# EAGLE board mcu_sub (EAGLE 7.7.0)
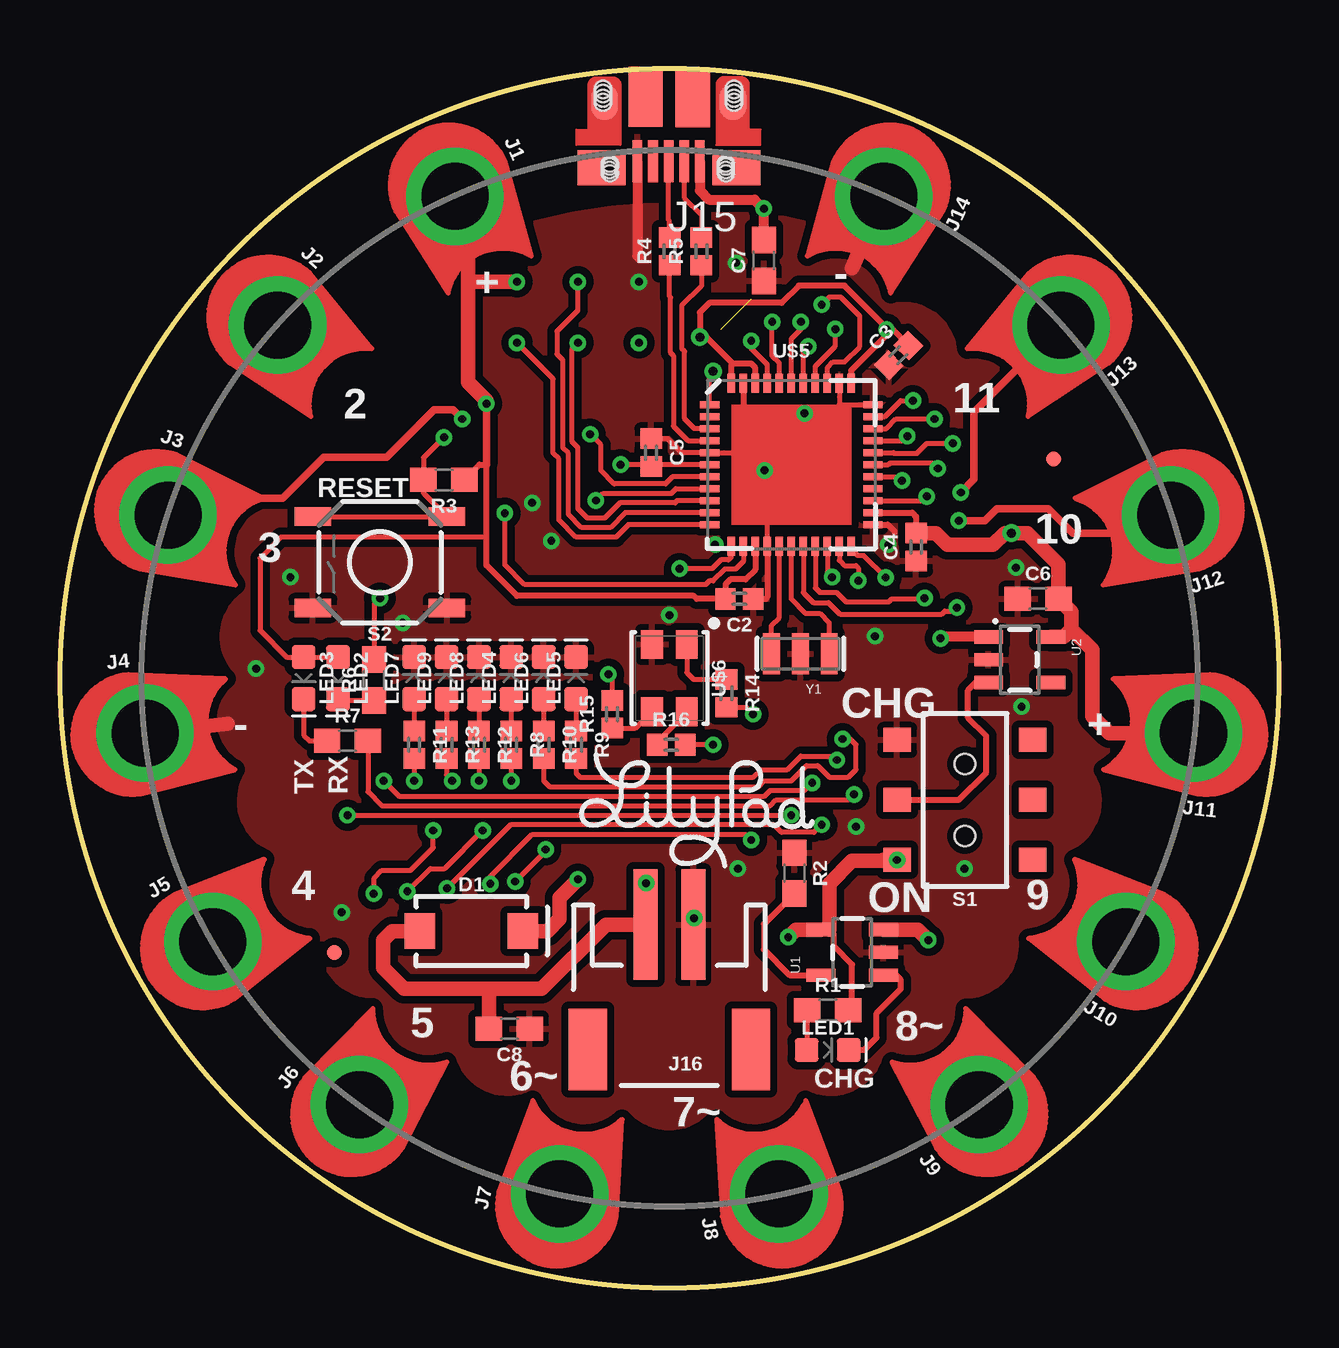
[diagram p0: board, top side]
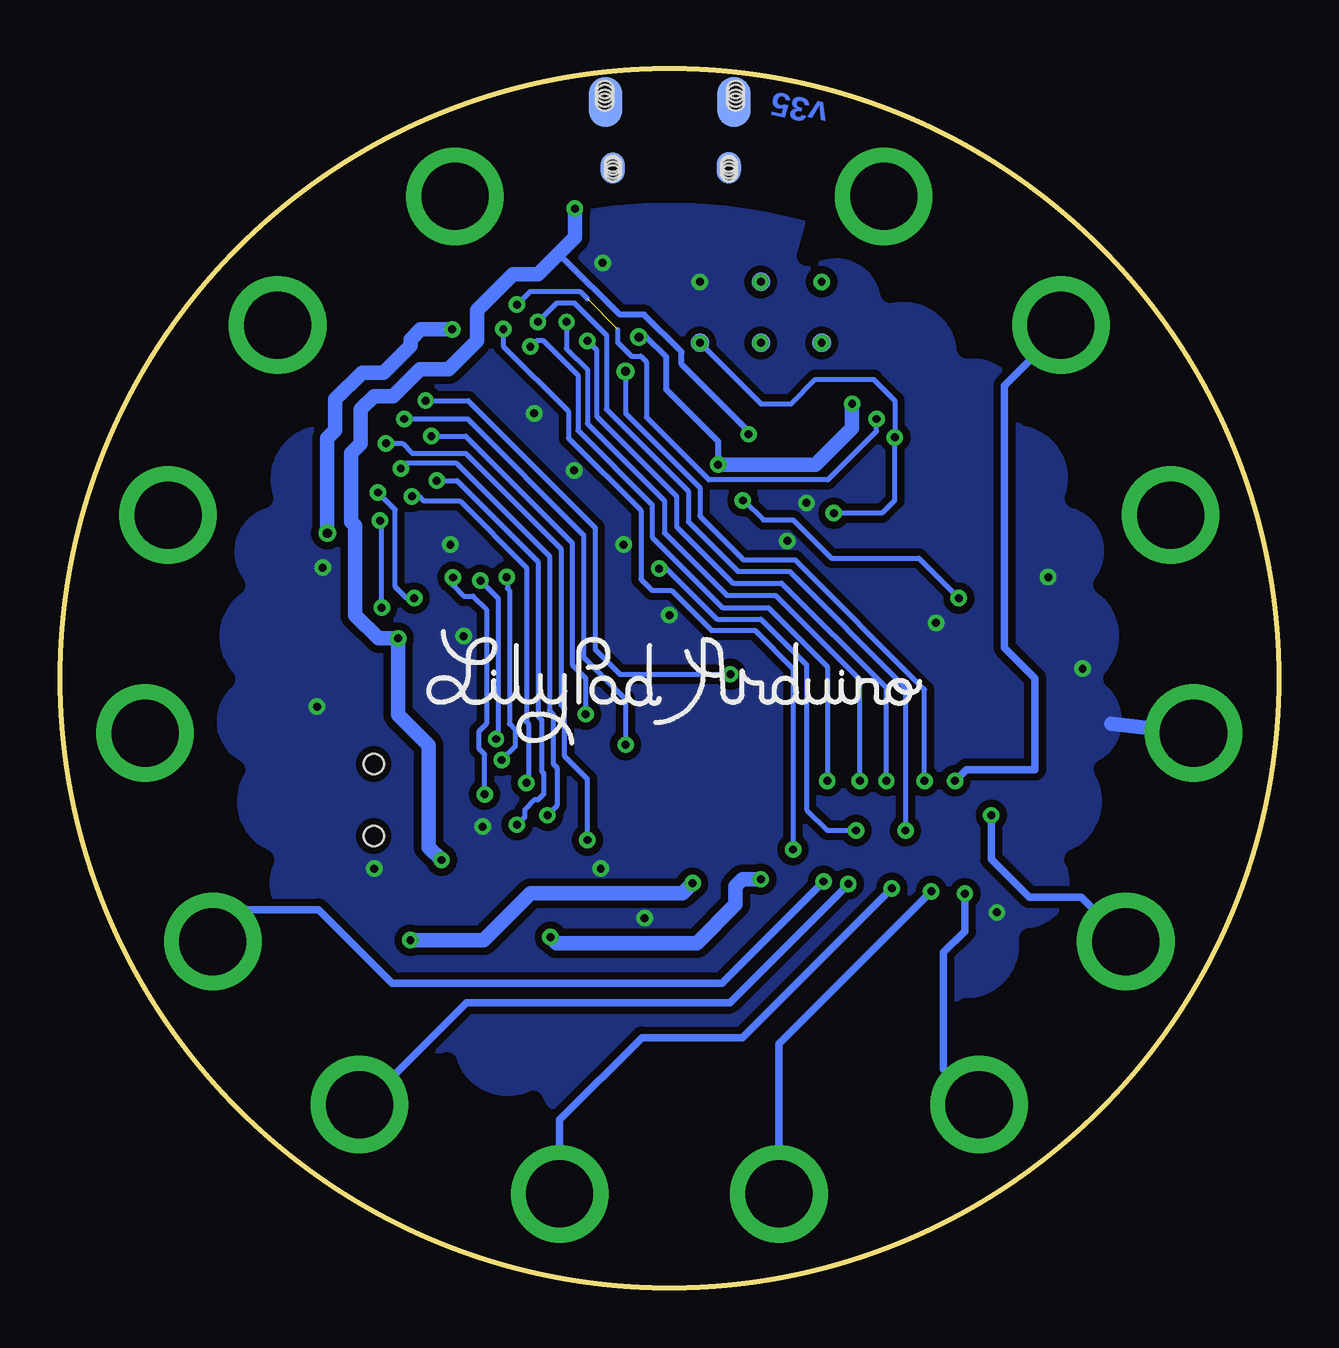
[diagram p1: board, bottom side, seen from below]

Size 50.8 x 50.8 mm. Coordinates in mm from the lower left corner, seen from the top.
Outline: circle at 25.4,25.4 radius 25.4
Copper layers (1*16): Top 0.035mm / dielectric 1.5mm / Bottom 0.035mm
Design rules "SparkFun-2-layer-TIGHT": minimum track width 7mil, minimum drill 15mil, track to track 7mil, track to pad 7mil, pad to pad 7mil, via to via 7mil, smd to smd 7mil, copper to edge 7mil, drill to drill 7mil, minimum pad ring 7mil, minimum via ring 7mil, stop-mask expansion 4mil, vias tented up to drill 25mil, thermal gap 10mil
tRestrict: 1 lines
bRestrict: 1 lines

## Footprints (pad centres in the part's own frame; a part is rotated, then mirrored left to right if it is on the bottom)
0402 = smd 0.85 x 0.9: 1 -0.58,0; 2 0.58,0
0603 = smd 1.1 x 1: 1 -0.85,0; 2 0.85,0
SMA-DIODE = smd 1.27 x 1.47: A -2.15,0; C 2.15,0
PETAL-LONG-1 = drill 2.794 pad 4.064: 1 0.03,0
USB-MICROB-PTH = smd 0.4 x 1.75: D+ 0.031,1.331; D- -0.619,1.331; GND 1.331,1.331; ID 0.681,1.331; VBUS -1.269,1.331 | smd 1.4 x 2.1 bottom: P$1 2.701,-1.142; P$3 -2.659,-1.144 | smd 1 x 1.3: P$2 2.487,1.594; P$6 -2.368,1.604 | smd 1 x 1.3 bottom: P$4 -2.368,1.604; P$10 2.481,1.598 | smd 1.1 x 1.5: P$8 2.701,-1.142; P$12 -2.659,-1.144 | smd 2 x 1.46: SHEILD2 2.831,1.606; SHIELD -2.794,1.606 | smd 1.425 x 2.5: SHIELD3 -0.979,-1.349; SHIELD4 0.996,-1.352 | hole 0.7: -2.693,-1.134; -2.693,-1.3; -2.694,-1.499; -2.694,-1.664; 2.768,-1.134; 2.767,-1.303; 2.766,-1.496; 2.766,-1.664 | hole 0.66: -2.359,1.821; -2.349,1.691; -2.359,1.541; -2.354,1.432; 2.481,1.821; 2.491,1.691; 2.481,1.541; 2.486,1.432
JST-2-SMD = smd 1 x 4.6: 1 -1,-3.7; 2 1,-3.7 | smd 1.6 x 3.4: NC1 -3.4,1.5; NC2 3.4,1.5
MICRO-FIDUCIAL = smd 0.635 x 0.635: 1 0,0
LED-0603 = smd 1 x 1: A -0.877,0; C 0.877,0
SWITCH_DPDT_SMD_AYZ0202 = smd 1 x 1.15: 1 -2.5,2.825; 2 0,2.825; 3 2.5,2.825; 4 -2.5,-2.825; 5 0,-2.825; 6 2.5,-2.825 | hole 0.85: 1.5,0; -1.5,0
TACTILE_SWITCH_SMD_5.2MM = smd 1.524 x 0.762: 1 -2.794,1.905; 2 2.794,1.905; 3 -2.794,-1.905; 4 2.794,-1.905
PAD.03X.03 = smd 0.762 x 0.762: P$1 0,0
SOT23-5 = smd 0.55 x 1.2: 1 -0.95,-1.3; 2 0,-1.3; 3 0.95,-1.3; 4 0.95,1.3; 5 -0.95,1.3
QFN-44 = smd 0.8 x 0.3: 1 -3.4,2.5; 2 -3.4,2; 3 -3.4,1.5; 4 -3.4,1; 5 -3.4,0.5; 6 -3.4,0; 7 -3.4,-0.5; 8 -3.4,-1; 9 -3.4,-1.5; 10 -3.4,-2; 11 -3.4,-2.5; 23 3.4,-2.5; 24 3.4,-2; 25 3.4,-1.5; 26 3.4,-1; 27 3.4,-0.5; 28 3.4,0; 29 3.4,0.5; 30 3.4,1; 31 3.4,1.5; 32 3.4,2; 33 3.4,2.5 | smd 0.3 x 0.8: 12 -2.5,-3.4; 13 -2,-3.4; 14 -1.5,-3.4; 15 -1,-3.4; 16 -0.5,-3.4; 17 0,-3.4; 18 0.5,-3.4; 19 1,-3.4; 20 1.5,-3.4; 21 2,-3.4; 22 2.5,-3.4; 34 2.5,3.4; 35 2,3.4; 36 1.5,3.4; 37 1,3.4; 38 0.5,3.4; 39 0,3.4; 40 -0.5,3.4; 41 -1,3.4; 42 -1.5,3.4; 43 -2,3.4; 44 -2.5,3.4
PLCC4SMDLED = smd 1.2 x 0.9: 1 -1.4,0.725; 2 1.4,0.725; 3 1.4,-0.725; 4 -1.4,-0.725
RESONATOR-SMD = smd 0.7 x 1.7: 1 -1.2,0; 2 0,0; 3 1.2,0

## Placement (x,y rotation side)
C2  0.1uF  [0402]  28.32,28.7 180 top
C3  0.1uF  [0402]  34.96,38.85 45 top
C4  0.1uF  [0402]  35.69,30.86 90 top
C5  1.0uF  [0402]  24.64,34.8 270 top
C6  4.7uF  [0603]  40.77,28.7 0 top
C7  4.7uF  [0603]  29.34,42.8 90 top
C8  4.7uF  [0603]  18.73,10.8 180 top
D1  3A/40V/500mV  [SMA-DIODE]  17.15,14.86 0 top
FRAME1  FRAME-LETTER  [CREATIVE_COMMONS]  -8.51,-10.16 0 top  (outside the outline)
J1  SEWTAP_LONG  [PETAL-LONG-1]  16.45,45.5 294 top
J2  SEWTAP_LONG  [PETAL-LONG-1]  9.05,40.12 318 top
J3  SEWTAP_LONG  [PETAL-LONG-1]  4.48,32.2 342 top
J4  SEWTAP_LONG  [PETAL-LONG-1]  3.52,23.1 6 top
J5  SEWTAP_LONG  [PETAL-LONG-1]  6.35,14.4 30 top
J6  SEWTAP_LONG  [PETAL-LONG-1]  12.47,7.6 54 top
J7  SEWTAP_LONG  [PETAL-LONG-1]  20.83,3.88 78 top
J8  SEWTAP_LONG  [PETAL-LONG-1]  29.97,3.88 102 top
J9  SEWTAP_LONG  [PETAL-LONG-1]  38.33,7.6 126 top
J10  SEWTAP_LONG  [PETAL-LONG-1]  44.45,14.4 150 top
J11  SEWTAP_LONG  [PETAL-LONG-1]  47.28,23.1 174 top
J12  SEWTAP_LONG  [PETAL-LONG-1]  46.32,32.2 198 top
J13  SEWTAP_LONG  [PETAL-LONG-1]  41.75,40.12 222 top
J14  SEWTAP_LONG  [PETAL-LONG-1]  34.35,45.5 246 top
J15  AMP FCI 10103594-0001LF  [USB-MICROB-PTH]  25.4,48.26 180 top
J16  [JST-2-SMD]  25.4,11.43 180 top
JP2  FIDUCIALUFIDUCIAL  [MICRO-FIDUCIAL]  11.43,13.97 0 top
JP3  FIDUCIALUFIDUCIAL  [MICRO-FIDUCIAL]  41.42,34.53 0 top
LED1  RED  [LED-0603]  32,9.91 0 top
LED2  RED  [LED-0603]  11.59,25.4 270 top
LED3  RED  [LED-0603]  10.16,25.4 270 top
LED4  WHITE  [LED-0603]  18.81,25.4 90 top
LED5  WHITE  [LED-0603]  21.51,25.4 90 top
LED6  WHITE  [LED-0603]  20.16,25.4 90 top
LED7  WHITE  [LED-0603]  14.76,25.4 90 top
LED8  WHITE  [LED-0603]  17.46,25.4 90 top
LED9  WHITE  [LED-0603]  16.11,25.4 90 top
R1  330  [0603]  32,11.56 0 top
R2  10k  [0603]  30.61,17.27 270 top
R3  10k  [0603]  16,33.66 180 top
R4  22  [0402]  25.42,43.18 90 top
R5  22  [0402]  26.73,43.18 90 top
R6  330  [0603]  13.1,25.32 90 top
R7  330  [0603]  11.99,22.78 0 top
R8  22  [0402]  18.81,22.62 270 top
R9  22  [0402]  21.51,22.62 270 top
R10  22  [0402]  20.16,22.62 270 top
R11  22  [0402]  14.76,22.62 270 top
R12  22  [0402]  17.46,22.62 270 top
R13  22  [0402]  16.11,22.62 270 top
R14  22  [0402]  27.78,24.76 270 top
R15  22  [0402]  23.02,23.89 90 top
R16  22  [0402]  25.48,22.62 0 top
S1  [SWITCH_DPDT_SMD_AYZ0202]  37.72,20.32 90 top
S2  !RESET  [TACTILE_SWITCH_SMD_5.2MM]  13.33,30.23 180 top
TP1  TEST-POINT3  [PAD.03X.03]  19.05,39.37 0 bottom
TP2  TEST-POINT3  [PAD.03X.03]  21.59,41.91 0 bottom
TP3  TEST-POINT3  [PAD.03X.03]  21.59,39.37 0 bottom
TP4  TEST-POINT3  [PAD.03X.03]  24.13,39.37 0 bottom
U1  MCP73831  [SOT23-5]  33.02,13.97 90 top
U2  3.3V  [SOT23-5]  40,26.16 270 top
U$1  LILYLOGO_LONG  [LILYPAD-WEARABLES_LOGO-LPA]  25.4,25.4 0 bottom
U$3  [PETAL_PAD_OFF]  16.45,45.5 294 top
U$5  32U4  [QFN-44]  30.48,34.29 0 top
U$6  XZM2CRKM2DGFBB45SCCB  [PLCC4SMDLED]  25.4,25.4 270 top
U$7  [PETAL_SPACE_OFF]  16.45,45.5 294 top
U$8  [PETAL_SPACE_OFF]  44.45,14.4 150 top
U$9  [PETAL_PAD_OFF]  44.45,14.4 150 top
U$10  [PETAL_SPACE_OFF]  46.32,32.2 198 top
U$11  [PETAL_PAD_OFF]  46.32,32.2 198 top
U$12  [PETAL_SPACE_OFF]  47.28,23.1 174 top
U$13  LILYLOGO_SHORT  [LILYPAD-WEARABLES_LOGO-LILYPAD]  26.59,20.24 0 top
U$15  [PETAL_PAD_OFF]  47.28,23.1 174 top
U$16  [PETAL_SPACE_OFF]  41.75,40.12 222 top
U$17  [PETAL_PAD_OFF]  41.75,40.12 222 top
U$18  [PETAL_SPACE_OFF]  20.83,3.88 78 top
U$19  [PETAL_PAD_OFF]  12.47,7.6 54 top
U$20  [PETAL_SPACE_OFF]  12.47,7.6 54 top
U$21  [PETAL_PAD_OFF]  20.83,3.88 78 top
U$22  [PETAL_SPACE_OFF]  29.97,3.88 102 top
U$23  [PETAL_PAD_OFF]  29.97,3.88 102 top
U$24  [PETAL_SPACE_OFF]  38.33,7.6 126 top
U$25  [PETAL_PAD_OFF]  38.33,7.6 126 top
U$26  [PETAL_SPACE_OFF]  9.05,40.12 318 top
U$27  [PETAL_PAD_OFF]  9.05,40.12 318 top
U$28  [PETAL_SPACE_OFF]  4.48,32.2 342 top
U$29  [PETAL_PAD_OFF]  4.48,32.2 342 top
U$30  [PETAL_SPACE_OFF]  3.52,23.1 6 top
U$31  [PETAL_PAD_OFF]  3.52,23.1 6 top
U$32  [PETAL_SPACE_OFF]  6.35,14.4 30 top
U$33  [PETAL_PAD_OFF]  6.35,14.4 30 top
U$34  [PETAL_PAD_OFF]  34.35,45.5 246 top
Y1  8MHz  [RESONATOR-SMD]  30.86,26.42 180 top

## Library data of the parts
C2-C4 = SparkFun-Capacitors; PROD_ID: CAP-12416
C5 = SparkFun-Capacitors; PROD_ID: CAP-12417
C6-C8 = SparkFun-Capacitors; PROD_ID: CAP-08280
D1 = SparkFun-DiscreteSemi; PROD_ID: DIO-09886
FRAME1 = SparkFun-Aesthetics
J1-J14 = LilyPad-Wearables
J15 = SparkFun-Connectors; PROD_ID: CONN-13711
J16 = SparkFun-Connectors; PROD_ID: CONN-11443; SF_ID: PRT-08612
JP2 JP3 = SparkFun
LED1-LED3 = SparkFun-LED; PROD_ID: DIO-00819
LED4-LED9 = SparkFun-LED; PROD_ID: DIO-09004
R1 R6 R7 = SparkFun-Resistors; PROD_ID: RES-00818
R2 R3 = SparkFun-Resistors; PROD_ID: RES-00824
R4 R5 R8-R16 = SparkFun-Resistors; PROD_ID: RES-12427
S1 = SparkFun-Switches; PROD_ID: SWCH-08179; SF_SKU: COM-00597
S2 = SparkFun-Switches; PROD_ID: SWCH-08247; SF_SKU: COM-08720
TP1-TP4 = SparkFun-Connectors
U1 = SparkFun-PowerIC; PROD_ID: IC-09995
U2 = SparkFun-IC-Power; PROD_ID: VREG-12457
U$1 U$3 U$7-U$13 U$15-U$34 = newLilypadParts
U$5 = newLilypadParts; PROD_ID: IC-10828
U$6 = newLilypadParts; PROD_ID: NEW-XXXXX
Y1 = SparkFun-FreqCtrl; PROD_ID: XTAL-08895

## Nets
3.3V: C2.2 C3.2 C4.2 C5.2 C6.2 J1.1 J11.1 LED2.A LED3.A R3.1 U2.5 U$5.6 U$5.14 U$5.24 U$5.34 U$5.42 U$5.44
BG_LED0: R8.2 U$5.38
BG_LED1: R9.2 U$5.20
BG_LED2: R10.2 U$5.21
BG_LED3: R11.2 U$5.1
BG_LED4: R12.2 U$5.40
BG_LED5: R13.2 U$5.41
D2: J2.1 U$5.25
D3: J3.1 U$5.36
D4: J5.1 U$5.28
D5: J6.1 U$5.39
D6: J7.1 U$5.12
D7: J8.1 U$5.27
D8: J9.1 U$5.29
D9: J10.1 U$5.37
D10: J12.1 U$5.18
D11: J13.1 U$5.19
D25: U$5.26
D+: R4.1 U$5.4
D-: R5.1 U$5.3
GND: C2.1 C3.1 C4.1 C5.1 C6.1 C7.1 C8.1 J4.1 J14.1 J15.GND J16.1 LED4.C LED5.C LED6.C LED7.C LED8.C LED9.C R2.1 S1.3 S2.1 S2.2 U1.2 U2.2 U$5.5 U$5.15 U$5.23 U$5.33 U$5.35 U$5.43 U$6.4 Y1.2
MISO: TP1.P$1 U$5.11
MOSI: TP2.P$1 U$5.10
N$1: LED2.C R6.1
N$2: S1.2 U2.3
N$3: LED1.A R1.1
N$4: LED1.C U1.1
N$5: U$5.17 Y1.1
N$6: R2.2 U1.5
N$7: U$5.16 Y1.3
N$8: R16.1 U$6.2
N$9: LED7.A R11.1
N$10: LED6.A R10.1
N$11: LED5.A R9.1
N$12: LED8.A R12.1
N$13: LED9.A R13.1
N$14: R15.1 U$6.3
N$15: R14.1 U$6.1
N$18: LED4.A R8.1
N$19: J15.D- R5.2
N$20: J15.D+ R4.2
N$21: LED3.C R7.1
RESET: R3.2 S2.3 S2.4 TP4.P$1 U$5.13
RGB_B: R15.2 U$5.32
RGB_G: R16.2 U$5.31
RGB_R: R14.2 U$5.30
RX_LED: R6.2 U$5.8
SCK: TP3.P$1 U$5.9
TX_LED: R7.2 U$5.22
V_BATT: C8.2 D1.A J16.2 U1.3
VCC_1: C7.2 D1.C J15.VBUS R1.2 S1.1 U1.4 U2.1 U$5.7

## Tracks (layer width: path | path; a pad name or v marks a point on that pad's centre or on a via)
3.3V  (via drill 0.33, 0.38)
  Top 0.203: U$5.6 24.71,34.29 | 24.71,34.29 C5.2 | 24.71,34.29 v23.37,34.29 | 17.78,31.27 9.21,31.27 8.33,30.4 8.33,27.38 9.44,26.28 LED3.A | LED3.A | LED3.A LED2.A
  Top 0.254: U$5.24 35.53,32.29 35.69,32.13 C4.2 | C4.2 | U$5.14 28.98,29.92 28.57,29.51 27.94,29.51 27.74,29.31 C2.2 26.54,28.7 26.42,28.83 19.05,28.83 17.78,30.1 17.78,31.27 v17.78,36.83 17.78,34.29 17.49,34.29 R3.1 | U$5.44 27.98,38.42 28.06,38.5 | U$5.42 28.98,38.33 28.81,38.5 28.06,38.5 | U$5.34 32.98,38.22 34.45,39.69 v34.45,39.93 | 28.06,38.5 26.95,39.61 v26.67,39.61 26.67,40.64 27.07,41.04 30.08,41.04 30.8,41.75 32.7,41.75 34.45,40 v34.45,39.93 | C3.2 34.7,39.93 v34.45,39.93
  Top 0.305: J1.1 17.02,44.92 | 17.78,36.96 17.78,34.29
  Top 0.61: U2.5 41.84,27.11 42.16,27.43 | 42.16,27.43 42.16,28.15 C6.2 41.62,30.14 40.31,31.44 v39.66,31.44 39.38,31.44 38.89,30.96 36.99,30.96 36.5,31.44 C4.2 | 17.02,44.92 17.02,41.91 | 17.02,41.91 17.02,37.72 17.78,36.96 | v19.05,41.91 17.02,41.91 | J11.1 43.73,23.1 43.02,23.81 43.02,26.57 42.16,27.43
  Bottom 0.254: v23.37,34.29 23.37,35.26 25.53,37.42 25.53,38.78 26.35,39.61 v26.67,39.61
  Bottom 0.61: v17.78,36.83 17.78,35.81 19.3,34.29 v23.37,34.29 | v39.66,31.44 39.66,35.4 39.32,35.73 39.32,37.02 38.21,38.13 37.31,38.13 36.2,39.24 36.2,39.5 35.77,39.93 v34.45,39.93
BG_LED0  (via drill 0.33)
  Top 0.203: U$5.38 30.98,39 v31.19,39.21 | R8.2 v18.81,21.11
  Bottom 0.203: v31.19,39.21 30.96,39.45 30.64,39.45 29.21,38.02 29.21,35.72 26.11,32.62 26.11,31.27 23.18,28.34 21.27,28.34 18.81,25.88 v18.81,21.11
BG_LED1  (via drill 0.33)
  Top 0.203: U$5.20 31.98,29.8 v32.18,29.61 | R9.2 21.51,21.43 21.67,21.27 28.89,21.27 29.21,21.59 30.32,21.59 30.88,22.15 32.23,22.15 v32.38,21.99
  Bottom 0.203: v32.18,29.61 32.15,29.57 32.15,29.13 32.07,29.05 32.07,23.49 31.83,23.26 31.83,22.54 v32.38,21.99
BG_LED2  (via drill 0.33)
  Top 0.203: U$5.21 32.48,30.31 32.7,30.08 33.18,30.08 33.27,29.99 v33.27,29.46 33.27,29.59 | R10.2 20.16,21.11 20.4,20.88 29.13,20.88 29.37,21.11 30.48,21.11 31.11,21.75 31.59,21.75 32.07,21.27 32.86,21.27 33.18,21.59 33.18,22.62 32.94,22.86 v32.62,22.86
  Bottom 0.203: v33.27,29.46 32.54,28.73 32.54,22.94 v32.62,22.86
BG_LED3  (via drill 0.33, 0.38)
  Top 0.203: U$5.1 27.08,38.01 27.23,38.15 v27.23,38.18 | R11.2 v14.76,21.11
  Bottom 0.203: v27.23,38.18 27.23,36.43 24.13,33.34 24.13,32.15 22.3,30.32 20.16,30.32 14.76,24.92 v14.76,21.11
BG_LED4  (via drill 0.33)
  Top 0.203: U$5.40 29.98,38.52 29.69,38.81 v29.69,40.24 | R12.2 v17.46,21.11
  Bottom 0.203: v29.69,40.24 29.69,39.13 28.81,38.26 28.81,36 25.61,32.8 25.61,31.45 23,28.84 20.97,28.84 17.46,25.34 v17.46,21.11
BG_LED5  (via drill 0.33)
  Top 0.203: U$5.41 29.48,38.46 28.81,39.13 v28.81,39.45 | R13.2 16.11,21.35 v16.35,21.11
  Bottom 0.203: v16.35,21.11 16.35,24.99 20.72,29.35 22.75,29.35 25.1,31.7 25.1,32.97 28.42,36.29 28.42,39.05 v28.81,39.45
D2  (via drill 0.33)
  Top 0.203: U$5.25 35.95,32.79 v36.13,32.97 | v13.49,21.11 14.13,20.48 29.37,20.48 29.61,20.72 31.04,20.72 v31.35,21.03
  Bottom 0.203: v36.13,32.97 35.83,32.97 35.64,32.78 34.13,32.78 31.35,30 31.35,23.57 31.27,23.49 31.27,21.11 v31.35,21.03
  Bottom 0.305: v13.49,21.11 13.02,21.59 10.16,21.59 10.16,25.4 11.43,26.67 11.43,37.59 9.07,39.94 J2.1
D3  (via drill 0.33)  (1 unrouted)
  Top 0.203: 7.11,32.89 6.41,32.19 J3.1 | U$5.36 31.98,38.33 32.23,38.58 32.7,38.58 33.34,39.21 33.34,40.48 32.54,41.27 32.07,41.27 v31.75,40.96
  Top 0.305: v16.76,36.2 16.38,36.58 15.59,36.58 13.6,34.59 10.98,34.59 9.29,32.89 7.11,32.89
  Bottom 0.203: v16.76,36.2 16.76,35.69 18.8,33.66 23.75,33.66 26.35,36.26 26.35,38.58 26.59,38.81 26.99,38.81 27.56,39.39 27.56,39.93 | v31.75,40.96 31.19,41.51 29.13,41.51 28.81,41.2
D4  (via drill 0.33)
  Top 0.203: U$5.28 34.53,34.29 34.61,34.37 36.35,34.37 v36.59,34.13 | v11.99,19.68 v30.48,19.68
  Bottom 0.203: v36.59,34.13 36.35,34.37 34.29,34.37 30.4,30.48 30.4,24.05 30.24,23.89 30.24,21.83 30.08,21.67 30.08,20.08 v30.48,19.68
  Bottom 0.305: J5.1 8.23,16.27 10.4,16.27 11.99,17.86 v11.99,19.68
D5  (via drill 0.33)
  Top 0.203: U$5.39 30.48,39.53 30.88,39.93 v30.88,40.24 | v13.08,16.41 13.1,16.43 13.1,17.07 13.41,17.38 14.6,17.38 15.56,18.34 v15.56,19.05
  Bottom 0.203: v30.88,40.24 30.08,41.04 29.37,41.04 28.02,39.69 28.02,36.59 24.61,33.18 24.61,31.91 22.54,29.84 20.4,29.84 15.56,25 v15.56,19.05
  Bottom 0.305: J6.1 13.97,9.11 13.97,13.97 13.08,14.86 v13.08,16.41
D6  (via drill 0.33)
  Top 0.203: v17.62,19.05 16.03,17.46 15.43,17.46 v14.48,16.51 | 27.97,30.89 27.97,30.43 27.86,30.32 27.54,30.32 27.18,29.96 v25.83,29.96
  Top 0.254: U$5.12 27.97,30.89
  Bottom 0.203: v25.83,29.96 25.51,29.96 23.42,27.86 21.59,27.86 19.68,25.96 19.68,19.92 18.81,19.05 v17.62,19.05
  Bottom 0.305: J7.1 20.83,10.16 v14.48,16.51
D7  (via drill 0.33)
  Top 0.203: U$5.27 34.93,33.79 v35.1,33.62 | v31.75,19.29 31.43,18.97 30.08,18.97 29.77,19.29 18.78,19.29 v16.13,16.64
  Bottom 0.203: v35.1,33.62 34.26,33.62 30.88,30.24 30.88,23.81 30.72,23.65 30.72,21.51 30.64,21.43 30.64,20.56 30.88,20.32 31.04,20.32 31.43,19.92 31.43,19.61 v31.75,19.29
  Bottom 0.305: J8.1 29.97,6.99 26.54,10.41 22.35,10.41 v16.13,16.64
D8  (via drill 0.33)
  Top 0.203: U$5.29 34.74,34.79 34.77,34.77 35.72,34.77 36.13,35.18 v37.21,35.18 | v17.94,16.83 17.94,17.14 19.68,18.89 28.57,18.89 v28.81,18.65
  Bottom 0.203: v37.21,35.18 36.53,35.18 36.12,34.77 33.89,34.77 29.92,30.8 29.92,24.29 29.77,24.13 29.77,22.15 28.81,21.19 v28.81,18.65
  Bottom 0.305: J9.1 38.09,7.63 33.84,11.87 22.88,11.87 17.94,16.81 v17.94,16.83
D9  (via drill 0.33)
  Top 0.203: U$5.37 31.48,38.39 32.32,39.23 v32.32,39.94 | v18.97,16.92 20.24,18.19 v20.24,18.26
  Bottom 0.203: v32.32,39.94 32.32,39.23 29.61,36.51 29.61,35.4 26.59,32.38 26.59,29.53 26.11,29.05 25.32,29.05 23.65,27.38 21.83,27.38 20.24,25.8 v20.24,18.26
  Bottom 0.305: J10.1 43.09,15.75 40.02,15.75 36.96,12.68 36.83,12.68 23.21,12.68 v18.97,16.92
D10  (via drill 0.33)
  Top 0.203: U$5.18 30.98,28.96 31.4,28.54 32.04,28.54 32.51,28.07 36.75,28.07 36.88,28.19 37.24,28.19 v37.39,28.34
  Top 0.305: J12.1 45.54,31.43 42.23,31.43 41.2,32.46 39.05,32.46 38.55,31.96 v37.46,31.96
  Bottom 0.203: v37.39,28.34 37.39,31.88 v37.46,31.96
D11  (via drill 0.33)
  Top 0.203: U$5.19 31.48,29.16 31.67,28.97 32.37,28.97 32.77,28.57 34.54,28.57 34.67,28.7 36,28.7 v36.04,28.73
  Top 0.254: 38.1,34.29 38.1,34.16
  Top 0.305: J13.1 38.1,36.47 38.1,34.29 38.1,33.69 v37.54,33.13
  Bottom 0.203: v36.04,28.73 36.35,28.73 36.83,29.21 36.83,32.42 v37.54,33.13
D+
  Top 0.203: U$5.4 26.18,35.29 25.57,35.9 25.57,38.84 25.46,38.95 25.46,41.26 25.42,41.3 R4.1
D-
  Top 0.203: U$5.3 26.44,35.79 26.04,36.2 26.04,39.01 25.92,39.13 25.92,40.92 26.73,41.73 R5.1
GND  (via drill 0.33)
  Top 0.203: 28.31,34.79 U$5.5 25.92,34.79 25.33,35.38 C5.1 | 28.31,34.79 28.32,34.8 29.48,34.8 | U$5.35 32.48,36.79 | 32.48,36.79 U$5.33 | U$5.15 29.48,34.8 | 28.57,36.45 28.57,34.79 28.31,34.79 | 32.48,36.79 32.48,34.8 29.48,34.8
  Top 0.254: U$5.23 34.5,31.79 34.8,31.5 | U$5.43 28.48,36.54 28.57,36.45 | U$5.15 29.48,28.77 | C2.1 29.42,28.7 29.45,28.73
  Top 0.406: J15.GND 24.07,42.99 24.13,42.93
  Top 0.61: J4.1 6.98,23.49 | J14.1 33.02,42.47
  Bottom 0.61: J4.1 6.98,23.49
  other vias: 24.13,41.91 28.18,42.7 27.3,30.96 34.53,30.96 31.04,36.43 29.37,34.05 20.48,31.11 19.68,32.7 14.29,27.7 9.6,29.61 8.18,25.8 11.75,15.64 26.43,15.4 28.26,17.46 37.7,17.46 33.18,19.21 25.4,28.02 33.97,27.15 39.85,30 40.08,24.21
  pour Top (isolate 0.305): 50.8,25.4 arc90 25.4,50.8 arc90 0,25.4 arc90 25.4,0 arc90
  pour Bottom (isolate 0.305): 50.8,25.4 arc90 25.4,50.8 arc90 0,25.4 arc90 25.4,0 arc90
MISO  (via drill 0.33)
  Top 0.203: 19.05,39.24 TP1.P$1 20.56,37.86 20.56,34.77 20.8,34.53 20.8,31.99 21.51,31.27 23.18,31.27 23.69,31.79 U$5.11
  other vias: 19.05,39.37
MOSI  (via drill 0.33)
  Top 0.203: U$5.10 23.56,32.29 22.94,31.67 21.75,31.67 21.19,32.23 21.19,34.77 20.95,35 20.95,38.66 20.72,38.89 20.72,39.85 21.59,40.72 TP2.P$1
  other vias: 21.59,41.91
N$1
  Top 0.203: LED2.C 11.64,24.47 R6.1
N$2
  Top 0.254: S1.2 37.46,20.32 38.61,21.46 38.61,22.99 37.85,23.75 37.85,24.89 38.17,25.21 U2.3
N$3
  Top 0.203: LED1.A 31.15,9.93 R1.1
N$4
  Top 0.254: LED1.C 33.53,9.91 34.04,10.41 34.04,11.43 35.05,12.45 35.05,12.83 34.86,13.02 U1.1
N$5
  Top 0.203: U$5.17 30.48,28.7 31.08,28.1 31.67,28.1 32.06,27.71 Y1.1
N$6
  Top 0.254: R2.2 29.34,15.15 29.34,14.1 30.41,13.02 U1.5
N$7
  Top 0.203: Y1.3 29.66,27.6 29.98,27.92 U$5.16
N$8
  Top 0.203: R16.1 24.9,22.76 26.12,23.98 U$6.2
N$9
  Top 0.203: LED7.A R11.1
N$10
  Top 0.203: LED6.A R10.1
N$11
  Top 0.203: LED5.A R9.1
N$12
  Top 0.203: LED8.A R12.1
N$13
  Top 0.203: LED9.A R13.1
N$14
  Top 0.203: R15.1 23.99,23.31 U$6.3
N$15
  Top 0.203: U$6.1 26.12,25.63 26.41,25.34 R14.1
N$18
  Top 0.203: LED4.A R8.1
N$19
  Top 0.203: J15.D- 26.02,45.42 26.73,44.7 R5.2
N$20
  Top 0.203: R4.2 25.4,43.78 25.4,44.45 25.37,44.48 J15.D+
N$21
  Top 0.203: LED3.C 10.16,23.02 10.4,22.78 R7.1
RESET  (via drill 0.33)
  Top 0.203: U$5.13 28.48,30.26 28.16,29.94 27.72,29.94 27.23,29.45 27.07,29.45 26.91,29.29 19.37,29.29 18.54,30.11 v18.54,32.27 | v16,35.43 15.15,34.58 R3.2 15.15,33.11 S2.3 S2.4
  Bottom 0.203: TP4.P$1 21.59,36.83 20.32,36.83 19.3,37.85 16.89,37.85 16,36.96 v16,35.43 16,32.81 16.54,32.27 v18.54,32.27
  other vias: 24.13,39.37
RGB_B  (via drill 0.33)
  Top 0.203: U$5.32 34.38,36.29 35.05,36.96 v35.56,36.96 | v22.86,25.56 23.02,25.4 R15.2
  Bottom 0.203: v35.56,36.96 33.78,36.96 28.5,31.67 28.5,26.59 27.46,25.56 v22.86,25.56
RGB_G  (via drill 0.33)
  Top 0.203: U$5.31 34.44,35.79 34.85,36.2 v36.45,36.2 | v27.23,22.62 R16.2
  Bottom 0.203: v36.45,36.2 33.81,36.2 28.97,31.35 28.97,26.27 27.23,24.53 v27.23,22.62
RGB_R  (via drill 0.33)
  Top 0.203: R14.2 28.6,24.18 v28.89,23.89 | U$5.30 35.13,35.29 v35.32,35.48
  Bottom 0.203: v35.32,35.48 33.89,35.48 29.45,31.04 29.45,25.96 28.89,25.4 v28.89,23.89
RX_LED  (via drill 0.33)
  Top 0.203: v13.33,28.73 13.1,28.5 R6.2 | v22.34,32.8 22.64,33.1 25.48,33.1 25.67,33.29 U$5.8
  Bottom 0.203: v13.33,28.73 15,30.4 18.65,30.4 20.24,31.99 21.48,31.99 22.29,32.8 v22.34,32.8
SCK  (via drill 0.33)
  Top 0.203: U$5.9 25.73,32.79 25.64,32.7 23.34,32.7 22.7,32.07 21.99,32.07 21.59,32.46 21.59,35 21.35,35.24 21.35,39.13 TP3.P$1
  other vias: 21.59,39.37
TX_LED  (via drill 0.33)
  Top 0.203: 32.98,30.77 33.24,30.51 33.5,30.51 v34.42,29.59 | v33.1,20.56 32.86,20.32 29.84,20.32 29.61,20.08 13.41,20.08 12.84,20.66 R7.2
  Top 0.254: U$5.22 32.98,30.77
  Bottom 0.203: v34.42,29.59 34.42,29.26 33.97,28.81 33.58,28.81 33.02,28.26 33.02,23.49 33.34,23.18 33.34,22.46 33.1,22.22 v33.1,20.56
V_BATT  (via drill 0.33)
  Top 0.61: J16.2 22.75,15.13 20.07,12.45 17.78,12.45 | 17.78,12.45 14.35,12.45 13.46,13.33 13.46,14.48 13.84,14.86 D1.A | J16.2 24.38,15.15 24.38,16.43 | U1.3 35.75,14.92 v36.2,14.48 | C8.2 17.88,12.34 17.78,12.45 | v24.43,16.86 24.43,15.16 J16.2
  Bottom 0.61: v36.2,14.48 33.15,14.48 31.19,16.43 24.86,16.43 v24.43,16.86
VCC_1  (via drill 0.33)
  Top 0.203: U$5.7 25.54,33.79 25.24,33.5 23.1,33.5 22.54,34.05 22.54,35.12 v22.1,35.56
  Top 0.254: R1.2 33.02,11.72 33.02,13.46 32.26,14.22 32.26,14.73 32.07,14.92 U1.4 | 34.85,17.78 S1.1
  Top 0.406: U2.1 36.76,27.11 v36.7,27.05 | J15.VBUS 26.67,45.72 27.05,45.34 28.96,45.34 v29.34,44.96 | v29.34,44.96 | C7.2 v29.34,44.96
  Top 0.61: D1.C 20.32,14.86 20.83,15.37 20.83,16.26 v21.59,17.02 | v30.35,14.6 30.67,14.92 U1.4 | 32.07,14.92 32.07,16.83 33.02,17.78 34.29,17.78 | 34.29,17.78 34.85,17.78 | S1.1 34.33,17.82 34.29,17.78
  Bottom 0.254: v22.1,35.56 22.1,35.69 24.89,38.48 24.89,38.99 26.45,40.55 27.46,40.55 29.82,42.9 30.2,42.9
  Bottom 0.61: v21.59,17.02 22.35,17.02 22.64,16.73 22.64,15.97 24.26,14.35 30.1,14.35 v30.35,14.6 | S1.1 35.43,18.36 35.43,22.61 36.7,23.88 v36.7,27.05 37.53,27.05 38.5,28.02 38.5,31.75 38.66,31.91 38.66,34.77 38.26,35.16 38.26,36.59 37.7,37.15 36.91,37.15 35.8,38.26 34.61,38.26 33.42,39.45 33.42,40.72 31.91,42.23 30.88,42.23 30.2,42.9 29.34,43.77 v29.34,44.96
  other vias: 34.89,17.82

## Text on the board
Bottom: v35
tPlace: + | - | 2 | 11 | RESET | 10 | 3 | CHG | - | + | TX | RX | 4 | ON | 9 | 5 | 8~ | 6~ | CHG | 7~